# Altium PCB driver_V1.1.PcbDoc (part 2 of 2)
Units mm, origin at the board's own origin, x right, y up, seen from the top; angles counter-clockwise.
Board outline 200 x 65 mm, 2 copper layers (Top Layer, Bottom Layer), stack 1.58 mm thick; 210 components, 21 nets, 550 pads, 102 vias.
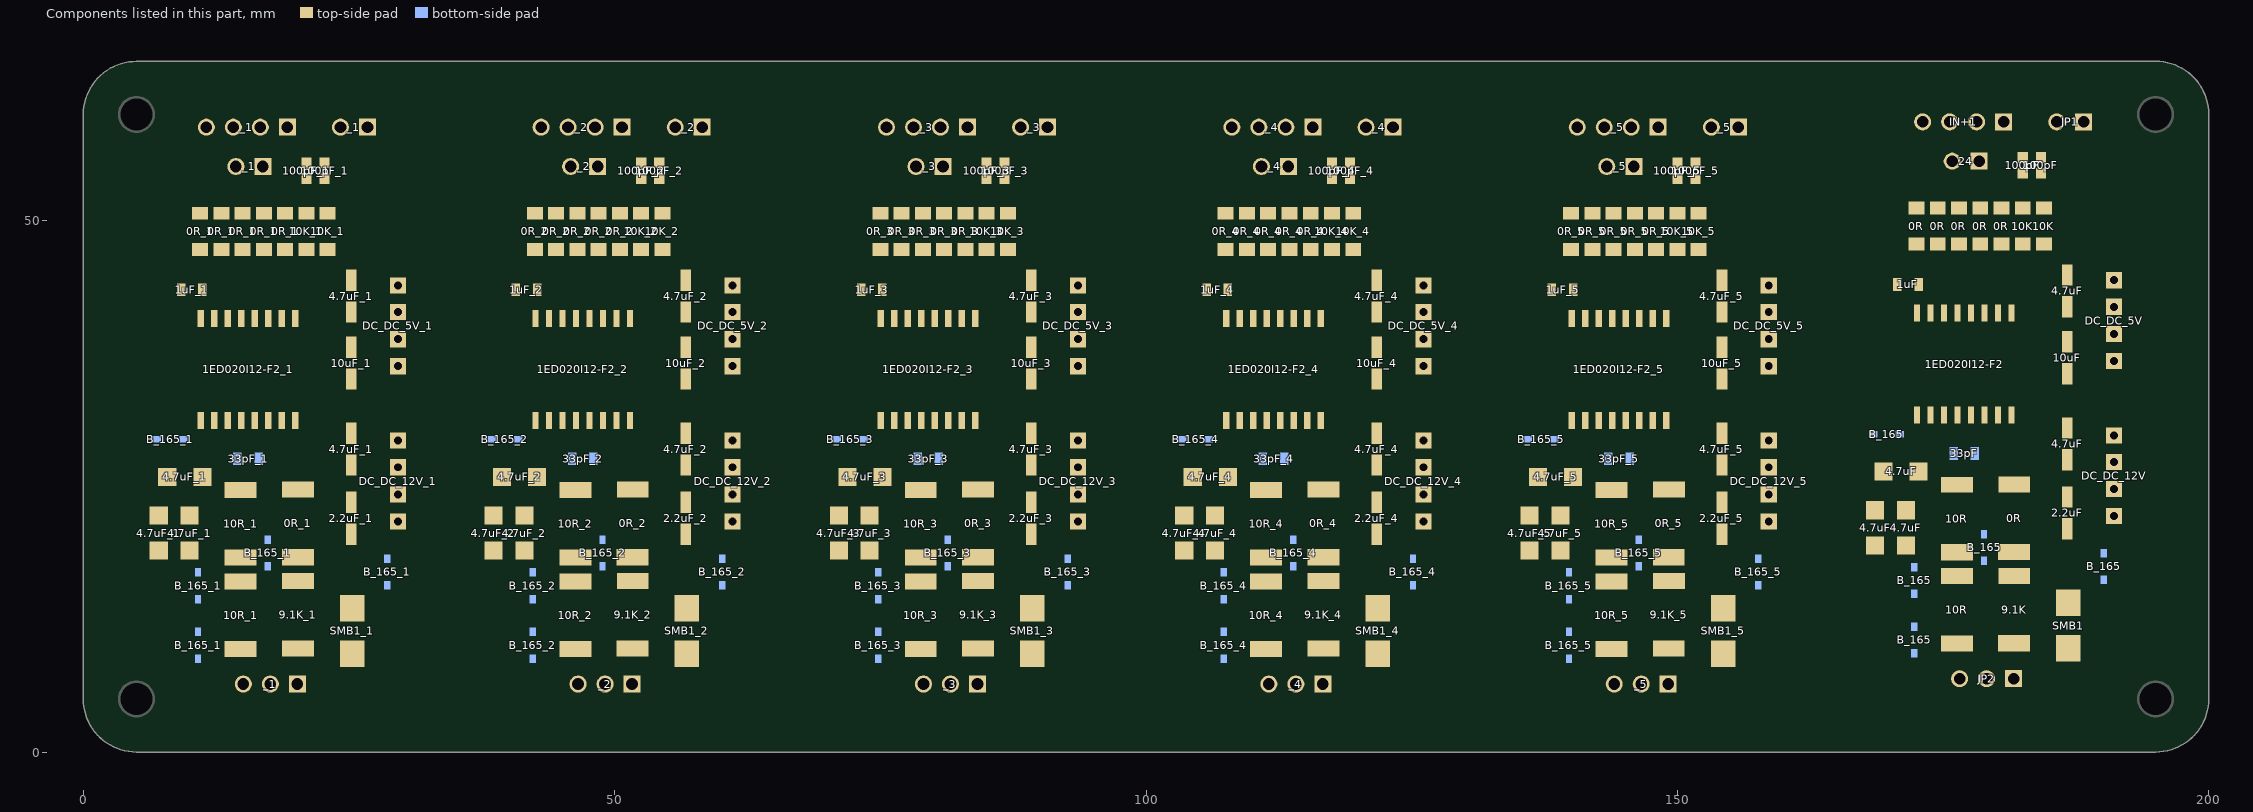
[diagram p2: the components of this part, seen from the top]

## Via types
v1: diameter 0.5, hole 0.2, Top Layer to Bottom Layer, 66 vias
v2: diameter 1, hole 0.72, Top Layer to Bottom Layer, 18 vias
v3: diameter 1.27, hole 0.72, Top Layer to Bottom Layer, 12 vias
v4: diameter 1, hole 0.7, Top Layer to Bottom Layer, 6 vias

## Nets (pads, with @x,y where several pads share a name; then routed paths per layer and width w, separated by ;. In a path a pad name is that pad's centre, name@x,y a point inside that pad or via, vN(x,y) a via of type N, cw(c..) or ccw(c..) an arc to the next point about the centre after c; other vN are vias at no path point) (continued)
copper on no net: | length 3334.4
  Top Layer w0.5: 7.1,22.25 6,23.35 6,30.6 6.52,31.12 v2(6.92,31.12) 10.975,31.12 11.055,31.2 ; v2(7.123,43.497) 9.2,43.497 9.2,41.22 9.62,40.8 11.055,40.8 ; 7.9,25.9 7.9,27.9 8.3,28.3 13.095,28.3 13.595,28.8 13.595,31.2 14.865,31.2 v1(14.865,29.335) ; 11,47.3 11,46.2 13.595,43.605 13.595,40.8 ; 11.2,25.9 11.2,26.8 11.5,27.1 15.4,27.1 16.135,27.835 16.135,31.2 ; 11.58,58.8 11,58.22 11,50.7 ; v3@11.9,22.28 v3@12.05,22.13 ; v1(12.3,29.4) 12.3,31.175 12.325,31.2 ; 12.325,40.8 12.325,43.175 12,43.5 11.2,43.5 11.2,43.996 9.12,46.077 9.12,50.2 9.62,50.7 11,50.7 ; 13,47.3 13,46.1 14.865,44.235 14.865,40.8 ; v1(13.7,14.3) 13.7,13.9 14,13.6 19.8,13.6 20.2,14 20.2,16.085 ; 14.36,58.56 14.12,58.8 14.12,61.26 14.85,61.99 21.3,61.99 22.22,61.07 22.22,55.93 22.7,55.45 ; 14.885,24.8 17.405,24.8 ; 15,47.3 15,46.2 16.135,45.065 16.135,40.8 ; 15,50.7 13,50.7 11,50.7 ; 16.66,58.8 16.9,58.56 16.9,55.1 16.9,50.8 17,50.7 ; 17,47.3 17.405,46.895 v1(17.405,45.28) 17.405,40.8 ; v2@17.319,16.051 v2@17.33,16.04 ; v1@17.4,21.39 v1(17.405,21.395) 17.405,24.8 ; 17.405,31.2 17.405,24.8 ; 18.675,31.2 18.675,25.125 19.215,24.585 20.1,24.585 ; 18.675,40.8 18.675,46.975 19,47.3 ; 19,50.7 19.2,50.9 19.2,58.8 ; v1(19.47,48.89) 20.59,48.89 21,49.3 21,50.7 ; 19.945,31.2 22,31.2 22.9,32.1 22.9,37.7 23.3,38.1 25.2,38.1 ; 19.945,40.8 19.945,43.245 20.3,43.6 22.8,43.6 23,43.8 23,47.3 23.3,47.6 25.3,47.6 25.9,48.2 25.9,54.86 25.31,55.45 22.7,55.45 ; v1(21,46) 21,47.3 ; 21,53.95 21.02,53.93 v1(21.02,52.4) ; 21,55.45 22.7,55.45 ; 22.7,53.95 v1(22.7,52.34) 22.7,51 23,50.7 ; 29.35,38.6 29.6,38.85 ; 29.4,27 29.6,26.8 ; 38.6,22.25 37.5,23.35 37.5,30.6 38.02,31.12 v2(38.42,31.12) 42.475,31.12 42.555,31.2 ; v2(38.623,43.497) 40.7,43.497 40.7,41.22 41.12,40.8 42.555,40.8 ; 39.4,25.9 39.4,27.9 39.8,28.3 44.595,28.3 45.095,28.8 45.095,31.2 46.365,31.2 v1(46.365,29.335) ; 42.5,47.3 42.5,46.2 45.095,43.605 45.095,40.8 ; 42.7,25.9 42.7,26.8 43,27.1 46.9,27.1 47.635,27.835 47.635,31.2 ; 43.08,58.8 42.5,58.22 42.5,50.7 ; v3@43.4,22.28 v3@43.55,22.13 ; v1(43.8,29.4) 43.8,31.175 43.825,31.2 ; 43.825,40.8 43.825,43.175 43.5,43.5 42.7,43.5 42.7,43.996 40.62,46.077 40.62,50.2 41.12,50.7 42.5,50.7 ; 44.5,47.3 44.5,46.1 46.365,44.235 46.365,40.8 ; v1(45.2,14.3) 45.2,13.9 45.5,13.6 51.3,13.6 51.7,14 51.7,16.085 ; 45.86,58.56 45.62,58.8 45.62,61.26 46.35,61.99 52.8,61.99 53.72,61.07 53.72,55.93 54.2,55.45 ; 46.385,24.8 48.905,24.8 ; 46.5,47.3 46.5,46.2 47.635,45.065 47.635,40.8 ; 46.5,50.7 44.5,50.7 42.5,50.7 ; 48.16,58.8 48.4,58.56 48.4,55.1 48.4,50.8 48.5,50.7 ; 48.5,47.3 48.905,46.895 v1(48.905,45.28) 48.905,40.8 ; v2@48.819,16.051 v2@48.83,16.04 ; v1@48.9,21.39 v1(48.905,21.395) 48.905,24.8 ; 48.905,31.2 48.905,24.8 ; 50.175,31.2 50.175,25.125 50.715,24.585 51.6,24.585 ; 50.175,40.8 50.175,46.975 50.5,47.3 ; 50.5,50.7 50.7,50.9 50.7,58.8 ; v1(50.97,48.89) 52.09,48.89 52.5,49.3 52.5,50.7 ; 51.445,31.2 53.5,31.2 54.4,32.1 54.4,37.7 54.8,38.1 56.7,38.1 ; 51.445,40.8 51.445,43.245 51.8,43.6 54.3,43.6 54.5,43.8 54.5,47.3 54.8,47.6 56.8,47.6 57.4,48.2 57.4,54.86 56.81,55.45 54.2,55.45 ; v1(52.5,46) 52.5,47.3 ; 52.5,53.95 52.52,53.93 v1(52.52,52.4) ; 52.5,55.45 54.2,55.45 ; 54.2,53.95 v1(54.2,52.34) 54.2,51 54.5,50.7 ; 60.85,38.6 61.1,38.85 ; 60.9,27 61.1,26.8 ; 71.1,22.25 70,23.35 70,30.6 70.52,31.12 v2(70.92,31.12) 74.975,31.12 75.055,31.2 ; v2(71.123,43.497) 73.2,43.497 73.2,41.22 73.62,40.8 75.055,40.8 ; 71.9,25.9 71.9,27.9 72.3,28.3 77.095,28.3 77.595,28.8 77.595,31.2 78.865,31.2 v1(78.865,29.335) ; 75,47.3 75,46.2 77.595,43.605 77.595,40.8 ; 75.2,25.9 75.2,26.8 75.5,27.1 79.4,27.1 80.135,27.835 80.135,31.2 ; 75.58,58.8 75,58.22 75,50.7 ; v3@75.9,22.28 v3@76.05,22.13 ; v1(76.3,29.4) 76.3,31.175 76.325,31.2 ; 76.325,40.8 76.325,43.175 76,43.5 75.2,43.5 75.2,43.996 73.12,46.077 73.12,50.2 73.62,50.7 75,50.7 ; 77,47.3 77,46.1 78.865,44.235 78.865,40.8 ; v1(77.7,14.3) 77.7,13.9 78,13.6 83.8,13.6 84.2,14 84.2,16.085 ; 78.36,58.56 78.12,58.8 78.12,61.26 78.85,61.99 85.3,61.99 86.22,61.07 86.22,55.93 86.7,55.45 ; 78.885,24.8 81.405,24.8 ; 79,47.3 79,46.2 80.135,45.065 80.135,40.8 ; 79,50.7 77,50.7 75,50.7 ; 80.66,58.8 80.9,58.56 80.9,55.1 80.9,50.8 81,50.7 ; 81,47.3 81.405,46.895 v1(81.405,45.28) 81.405,40.8 ; v2@81.319,16.051 v2@81.33,16.04 ; v1@81.4,21.39 v1(81.405,21.395) 81.405,24.8 ; 81.405,31.2 81.405,24.8 ; 82.675,31.2 82.675,25.125 83.215,24.585 84.1,24.585 ; 82.675,40.8 82.675,46.975 83,47.3 ; 83,50.7 83.2,50.9 83.2,58.8 ; v1(83.47,48.89) 84.59,48.89 85,49.3 85,50.7 ; 83.945,31.2 86,31.2 86.9,32.1 86.9,37.7 87.3,38.1 89.2,38.1 ; 83.945,40.8 83.945,43.245 84.3,43.6 86.8,43.6 87,43.8 87,47.3 87.3,47.6 89.3,47.6 89.9,48.2 89.9,54.86 89.31,55.45 86.7,55.45 ; v1(85,46) 85,47.3 ; 85,53.95 85.02,53.93 v1(85.02,52.4) ; 85,55.45 86.7,55.45 ; 86.7,53.95 v1(86.7,52.34) 86.7,51 87,50.7 ; 93.35,38.6 93.6,38.85 ; 93.4,27 93.6,26.8 ; 103.6,22.25 102.5,23.35 102.5,30.6 103.02,31.12 v2(103.42,31.12) 107.475,31.12 107.555,31.2 ; v2(103.623,43.497) 105.7,43.497 105.7,41.22 106.12,40.8 107.555,40.8 ; 104.4,25.9 104.4,27.9 104.8,28.3 109.595,28.3 110.095,28.8 110.095,31.2 111.365,31.2 v1(111.365,29.335) ; 107.5,47.3 107.5,46.2 110.095,43.605 110.095,40.8 ; 107.7,25.9 107.7,26.8 108,27.1 111.9,27.1 112.635,27.835 112.635,31.2 ; 108.08,58.8 107.5,58.22 107.5,50.7 ; v3@108.4,22.28 v3@108.55,22.13 ; v1(108.8,29.4) 108.8,31.175 108.825,31.2 ; 108.825,40.8 108.825,43.175 108.5,43.5 107.7,43.5 107.7,43.996 105.62,46.077 105.62,50.2 106.12,50.7 107.5,50.7 ; 109.5,47.3 109.5,46.1 111.365,44.235 111.365,40.8 ; v1(110.2,14.3) 110.2,13.9 110.5,13.6 116.3,13.6 116.7,14 116.7,16.085 ; 110.86,58.56 110.62,58.8 110.62,61.26 111.35,61.99 117.8,61.99 118.72,61.07 118.72,55.93 119.2,55.45 ; 111.385,24.8 113.905,24.8 ; 111.5,47.3 111.5,46.2 112.635,45.065 112.635,40.8 ; 111.5,50.7 109.5,50.7 107.5,50.7 ; 113.16,58.8 113.4,58.56 113.4,55.1 113.4,50.8 113.5,50.7 ; 113.5,47.3 113.905,46.895 v1(113.905,45.28) 113.905,40.8 ; v2@113.819,16.051 v2@113.83,16.04 ; v1@113.9,21.39 v1(113.905,21.395) 113.905,24.8 ; 113.905,31.2 113.905,24.8 ; 115.175,31.2 115.175,25.125 115.715,24.585 116.6,24.585 ; 115.175,40.8 115.175,46.975 115.5,47.3 ; 115.5,50.7 115.7,50.9 115.7,58.8 ; v1(115.97,48.89) 117.09,48.89 117.5,49.3 117.5,50.7 ; 116.445,31.2 118.5,31.2 119.4,32.1 119.4,37.7 119.8,38.1 121.7,38.1 ; 116.445,40.8 116.445,43.245 116.8,43.6 119.3,43.6 119.5,43.8 119.5,47.3 119.8,47.6 121.8,47.6 122.4,48.2 122.4,54.86 121.81,55.45 119.2,55.45 ; v1(117.5,46) 117.5,47.3 ; 117.5,53.95 117.52,53.93 v1(117.52,52.4) ; 117.5,55.45 119.2,55.45 ; 119.2,53.95 v1(119.2,52.34) 119.2,51 119.5,50.7 ; 125.85,38.6 126.1,38.85 ; 125.9,27 126.1,26.8 ; 136.1,22.25 135,23.35 135,30.6 135.52,31.12 v2(135.92,31.12) 139.975,31.12 140.055,31.2 ; v2(136.123,43.497) 138.2,43.497 138.2,41.22 138.62,40.8 140.055,40.8 ; 136.9,25.9 136.9,27.9 137.3,28.3 142.095,28.3 142.595,28.8 142.595,31.2 143.865,31.2 v1(143.865,29.335) ; 140,47.3 140,46.2 142.595,43.605 142.595,40.8 ; 140.2,25.9 140.2,26.8 140.5,27.1 144.4,27.1 145.135,27.835 145.135,31.2 ; 140.58,58.8 140,58.22 140,50.7 ; v3@140.9,22.28 v3@141.05,22.13 ; v1(141.3,29.4) 141.3,31.175 141.325,31.2 ; 141.325,40.8 141.325,43.175 141,43.5 140.2,43.5 140.2,43.996 138.12,46.077 138.12,50.2 138.62,50.7 140,50.7 ; 142,47.3 142,46.1 143.865,44.235 143.865,40.8 ; v1(142.7,14.3) 142.7,13.9 143,13.6 148.8,13.6 149.2,14 149.2,16.085 ; 143.36,58.56 143.12,58.8 143.12,61.26 143.85,61.99 150.3,61.99 151.22,61.07 151.22,55.93 151.7,55.45 ; 143.885,24.8 146.405,24.8 ; 144,47.3 144,46.2 145.135,45.065 145.135,40.8 ; 144,50.7 142,50.7 140,50.7 ; 145.66,58.8 145.9,58.56 145.9,55.1 145.9,50.8 146,50.7 ; 146,47.3 146.405,46.895 v1(146.405,45.28) 146.405,40.8 ; v2@146.319,16.051 v2@146.33,16.04 ; v1@146.4,21.39 v1(146.405,21.395) 146.405,24.8 ; 146.405,31.2 146.405,24.8 ; 147.675,31.2 147.675,25.125 148.215,24.585 149.1,24.585 ; 147.675,40.8 147.675,46.975 148,47.3 ; 148,50.7 148.2,50.9 148.2,58.8 ; v1(148.47,48.89) 149.59,48.89 150,49.3 150,50.7 ; 148.945,31.2 151,31.2 151.9,32.1 151.9,37.7 152.3,38.1 154.2,38.1 ; 148.945,40.8 148.945,43.245 149.3,43.6 151.8,43.6 152,43.8 152,47.3 152.3,47.6 154.3,47.6 154.9,48.2 154.9,54.86 154.31,55.45 151.7,55.45 ; v1(150,46) 150,47.3 ; 150,53.95 150.02,53.93 v1(150.02,52.4) ; 150,55.45 151.7,55.45 ; 151.7,53.95 v1(151.7,52.34) 151.7,51 152,50.7 ; 158.35,38.6 158.6,38.85 ; 158.4,27 158.6,26.8
  Top Layer w1: 7.1,18.95 10,18.95 ; 7.1,22.25 10,22.25 ; 10,19.05 10,18.95 ; 11.2,25.9 11.9,25.2 v3@11.9,22.28 ; 14.808,16.051 v2@17.319,16.051 ; 15.06,6.4 14.8,6.66 14.8,9.7 12.05,9.7 11.9,9.85 11.9,18.1 12.1,18.3 14.8,18.3 19.558,18.3 19.707,18.449 ; 17.6,4.56 17.6,6.4 ; 20.14,6.4 24.7,6.4 25.3,7 25.3,9.25 ; 20.192,10.034 20.734,10.034 24.25,13.55 25.3,13.55 ; 20.2,16.285 v4@26.435,16.285 ; 25.2,20.5 28.39,20.5 29.6,21.71 ; 25.2,23.5 25.95,24.25 29.6,24.25 32.3,24.25 ; 25.2,27 29.4,27 ; 25.2,30 28.9,30 29.6,29.3 ; 25.2,35.1 25.5,35.4 28.69,35.4 29.6,36.31 31.49,36.31 32.3,35.5 32.3,24.25 ; 25.2,38.1 25.7,38.6 29.35,38.6 ; 25.2,41.4 29.6,41.4 ; 25.2,44.4 25.7,43.9 29.6,43.9 ; 38.6,18.95 41.5,18.95 ; 38.6,22.25 41.5,22.25 ; 41.5,19.05 41.5,18.95 ; 42.7,25.9 43.4,25.2 v3@43.4,22.28 ; 46.308,16.051 v2@48.819,16.051 ; 46.56,6.4 46.3,6.66 46.3,9.7 43.55,9.7 43.4,9.85 43.4,18.1 43.6,18.3 46.3,18.3 51.058,18.3 51.207,18.449 ; 49.1,4.56 49.1,6.4 ; 51.64,6.4 56.2,6.4 56.8,7 56.8,9.25 ; 51.692,10.034 52.234,10.034 55.75,13.55 56.8,13.55 ; 51.7,16.285 v4@57.935,16.285 ; 56.7,20.5 59.89,20.5 61.1,21.71 ; 56.7,23.5 57.45,24.25 61.1,24.25 63.8,24.25 ; 56.7,27 60.9,27 ; 56.7,30 60.4,30 61.1,29.3 ; 56.7,35.1 57,35.4 60.19,35.4 61.1,36.31 62.99,36.31 63.8,35.5 63.8,24.25 ; 56.7,38.1 57.2,38.6 60.85,38.6 ; 56.7,41.4 61.1,41.4 ; 56.7,44.4 57.2,43.9 61.1,43.9 ; 71.1,18.95 74,18.95 ; 71.1,22.25 74,22.25 ; 74,19.05 74,18.95 ; 75.2,25.9 75.9,25.2 v3@75.9,22.28 ; 78.808,16.051 v2@81.319,16.051 ; 79.06,6.4 78.8,6.66 78.8,9.7 76.05,9.7 75.9,9.85 75.9,18.1 76.1,18.3 78.8,18.3 83.558,18.3 83.707,18.449 ; 81.6,4.56 81.6,6.4 ; 84.14,6.4 88.7,6.4 89.3,7 89.3,9.25 ; 84.192,10.034 84.734,10.034 88.25,13.55 89.3,13.55 ; 84.2,16.285 v4@90.435,16.285 ; 89.2,20.5 92.39,20.5 93.6,21.71 ; 89.2,23.5 89.95,24.25 93.6,24.25 96.3,24.25 ; 89.2,27 93.4,27 ; 89.2,30 92.9,30 93.6,29.3 ; 89.2,35.1 89.5,35.4 92.69,35.4 93.6,36.31 95.49,36.31 96.3,35.5 96.3,24.25 ; 89.2,38.1 89.7,38.6 93.35,38.6 ; 89.2,41.4 93.6,41.4 ; 89.2,44.4 89.7,43.9 93.6,43.9 ; 103.6,18.95 106.5,18.95 ; 103.6,22.25 106.5,22.25 ; 106.5,19.05 106.5,18.95 ; 107.7,25.9 108.4,25.2 v3@108.4,22.28 ; 111.308,16.051 v2@113.819,16.051 ; 111.56,6.4 111.3,6.66 111.3,9.7 108.55,9.7 108.4,9.85 108.4,18.1 108.6,18.3 111.3,18.3 116.058,18.3 116.207,18.449 ; 114.1,4.56 114.1,6.4 ; 116.64,6.4 121.2,6.4 121.8,7 121.8,9.25 ; 116.692,10.034 117.234,10.034 120.75,13.55 121.8,13.55 ; 116.7,16.285 v4@122.935,16.285 ; 121.7,20.5 124.89,20.5 126.1,21.71 ; 121.7,23.5 122.45,24.25 126.1,24.25 128.8,24.25 ; 121.7,27 125.9,27 ; 121.7,30 125.4,30 126.1,29.3 ; 121.7,35.1 122,35.4 125.19,35.4 126.1,36.31 127.99,36.31 128.8,35.5 128.8,24.25 ; 121.7,38.1 122.2,38.6 125.85,38.6 ; 121.7,41.4 126.1,41.4 ; 121.7,44.4 122.2,43.9 126.1,43.9 ; 136.1,18.95 139,18.95 ; 136.1,22.25 139,22.25 ; 139,19.05 139,18.95 ; 140.2,25.9 140.9,25.2 v3@140.9,22.28 ; 143.808,16.051 v2@146.319,16.051 ; 144.06,6.4 143.8,6.66 143.8,9.7 141.05,9.7 140.9,9.85 140.9,18.1 141.1,18.3 143.8,18.3 148.558,18.3 148.707,18.449 ; 146.6,4.56 146.6,6.4 ; 149.14,6.4 153.7,6.4 154.3,7 154.3,9.25 ; 149.192,10.034 149.734,10.034 153.25,13.55 154.3,13.55 ; 149.2,16.285 v4@155.435,16.285 ; 154.2,20.5 157.39,20.5 158.6,21.71 ; 154.2,23.5 154.95,24.25 158.6,24.25 161.3,24.25 ; 154.2,27 158.4,27 ; 154.2,30 157.9,30 158.6,29.3 ; 154.2,35.1 154.5,35.4 157.69,35.4 158.6,36.31 160.49,36.31 161.3,35.5 161.3,24.25 ; 154.2,38.1 154.7,38.6 158.35,38.6 ; 154.2,41.4 158.6,41.4 ; 154.2,44.4 154.7,43.9 158.6,43.9 ; 10,18.95 10,8 10.4,7.6 11.1,7.6 11.4,7.3 11.4,5.1 12.27,4.23 28.07,4.23 28.3,4.46 28.3,9.7 28.9,10.3 31.6,10.3 32.3,11 32.3,24.25 ; 41.5,18.95 41.5,8 41.9,7.6 42.6,7.6 42.9,7.3 42.9,5.1 43.77,4.23 59.57,4.23 59.8,4.46 59.8,9.7 60.4,10.3 63.1,10.3 63.8,11 63.8,24.25 ; 74,18.95 74,8 74.4,7.6 75.1,7.6 75.4,7.3 75.4,5.1 76.27,4.23 92.07,4.23 92.3,4.46 92.3,9.7 92.9,10.3 95.6,10.3 96.3,11 96.3,24.25 ; 106.5,18.95 106.5,8 106.9,7.6 107.6,7.6 107.9,7.3 107.9,5.1 108.77,4.23 124.57,4.23 124.8,4.46 124.8,9.7 125.4,10.3 128.1,10.3 128.8,11 128.8,24.25 ; 139,18.95 139,8 139.4,7.6 140.1,7.6 140.4,7.3 140.4,5.1 141.27,4.23 157.07,4.23 157.3,4.46 157.3,9.7 157.9,10.3 160.6,10.3 161.3,11 161.3,24.25
  Bottom Layer w0.5: v1(13.7,14.3) 13.7,16.5 13.3,16.9 10.8,16.9 10.3,17.4 10.3,28.539 10.961,29.2 12.1,29.2 v1(12.3,29.4) 12.3,27.9 12.597,27.603 14.5,27.603 ; v1(14.865,29.335) 21.465,29.335 21.9,28.9 21.9,24.8 22.45,24.25 29.6,24.25 31.42,24.25 32.23,23.44 32.23,19.12 31.32,18.21 28.62,18.21 ; v1@14.9,29.3 16.5,29.3 16.5,27.6 ; 16.66,55.34 16.9,55.1 ; 17.38,20.02 17.405,19.995 v1(17.405,21.395) ; v1(17.405,45.28) 20.66,45.28 21.02,45.64 v1(21.02,52.4) ; v1(18.7,43.98) 21.77,43.98 22.7,44.91 v1(22.7,52.34) ; 24.2,58.8 24.5,58.5 24.5,42 25.1,41.4 26.4,41.4 ; 29.6,26.8 27.2,26.8 26.4,27.6 26.4,41.4 ; 29.6,41.4 26.4,41.4 ; v1(45.2,14.3) 45.2,16.5 44.8,16.9 42.3,16.9 41.8,17.4 41.8,28.539 42.461,29.2 43.6,29.2 v1(43.8,29.4) 43.8,27.9 44.097,27.603 46,27.603 ; v1(46.365,29.335) 52.965,29.335 53.4,28.9 53.4,24.8 53.95,24.25 61.1,24.25 62.92,24.25 63.73,23.44 63.73,19.12 62.82,18.21 60.12,18.21 ; v1@46.4,29.3 48,29.3 48,27.6 ; 48.16,55.34 48.4,55.1 ; 48.88,20.02 48.86,20 48.86,21.35 v1(48.905,21.395) ; v1(48.905,45.28) 52.16,45.28 52.52,45.64 v1(52.52,52.4) ; v1(50.2,43.98) 53.27,43.98 54.2,44.91 v1(54.2,52.34) ; 55.7,58.8 56,58.5 56,42 56.6,41.4 57.9,41.4 ; 61.1,26.8 58.7,26.8 57.9,27.6 57.9,41.4 ; 61.1,41.4 57.9,41.4 ; v1(77.7,14.3) 77.7,16.5 77.3,16.9 74.8,16.9 74.3,17.4 74.3,28.539 74.961,29.2 76.1,29.2 v1(76.3,29.4) 76.3,27.9 76.597,27.603 78.5,27.603 ; v1(78.865,29.335) 85.465,29.335 85.9,28.9 85.9,24.8 86.45,24.25 93.6,24.25 95.42,24.25 96.23,23.44 96.23,19.12 95.32,18.21 92.62,18.21 ; v1@78.9,29.3 80.5,29.3 80.5,27.6 ; 80.66,55.34 80.9,55.1 ; 81.38,20.02 81.36,20 81.36,21.35 v1(81.405,21.395) ; v1(81.405,45.28) 84.66,45.28 85.02,45.64 v1(85.02,52.4) ; v1(82.7,43.98) 85.77,43.98 86.7,44.91 v1(86.7,52.34) ; 88.2,58.8 88.5,58.5 88.5,42 89.1,41.4 90.4,41.4 ; 93.6,26.8 91.2,26.8 90.4,27.6 90.4,41.4 ; 93.6,41.4 90.4,41.4 ; v1(110.2,14.3) 110.2,16.5 109.8,16.9 107.3,16.9 106.8,17.4 106.8,28.539 107.461,29.2 108.6,29.2 v1(108.8,29.4) 108.8,27.9 109.097,27.603 111,27.603 ; v1(111.365,29.335) 117.965,29.335 118.4,28.9 118.4,24.8 118.95,24.25 126.1,24.25 127.92,24.25 128.73,23.44 128.73,19.12 127.82,18.21 125.12,18.21 ; v1@111.4,29.3 113,29.3 113,27.6 ; 113.16,55.34 113.4,55.1 ; 113.88,20.02 113.86,20 113.86,21.35 v1(113.905,21.395) ; v1(113.905,45.28) 117.16,45.28 117.52,45.64 v1(117.52,52.4) ; v1(115.2,43.98) 118.27,43.98 119.2,44.91 v1(119.2,52.34) ; 120.7,58.8 121,58.5 121,42 121.6,41.4 122.9,41.4 ; 126.1,26.8 123.7,26.8 122.9,27.6 122.9,41.4 ; 126.1,41.4 122.9,41.4 ; v1(142.7,14.3) 142.7,16.5 142.3,16.9 139.8,16.9 139.3,17.4 139.3,28.539 139.961,29.2 141.1,29.2 v1(141.3,29.4) 141.3,27.9 141.597,27.603 143.5,27.603 ; v1(143.865,29.335) 150.465,29.335 150.9,28.9 150.9,24.8 151.45,24.25 158.6,24.25 160.42,24.25 161.23,23.44 161.23,19.12 160.32,18.21 157.62,18.21 ; v1@143.9,29.3 145.5,29.3 145.5,27.6 ; 145.66,55.34 145.9,55.1 ; 146.38,20.02 146.36,20 146.36,21.35 v1(146.405,21.395) ; v1(146.405,45.28) 149.66,45.28 150.02,45.64 v1(150.02,52.4) ; v1(147.7,43.98) 150.77,43.98 151.7,44.91 v1(151.7,52.34) ; 153.2,58.8 153.5,58.5 153.5,42 154.1,41.4 155.4,41.4 ; 158.6,26.8 156.2,26.8 155.4,27.6 155.4,41.4 ; 158.6,41.4 155.4,41.4
  Bottom Layer w1: 6.92,29.42 v2(6.92,31.12) 7.4,31.6 22.3,31.6 v3(22.8,32.1) ; v2@7.14,43.6 7.14,42.95 7.39,42.7 v1(19.94,42.7) ; 8.58,28.98 8.58,9.52 9.3,8.8 10.8,8.8 10.8,7.7 12.1,6.4 15.06,6.4 ; 10.8,11.3 14.9,11.3 15.7,12.1 15.7,21.4 14.94,22.16 v3(12.03,22.16) 12.03,25.33 12.6,25.9 18.8,25.9 19.3,25.4 19.3,22.2 19.79,21.71 29.6,21.71 ; 11.58,58.8 11.58,49.62 12.31,48.89 v1(19.47,48.89) v1@19.56,48.89 ; 14.12,58.8 14.36,58.56 14.36,55.1 ; v2(17.36,16.05) 17.36,17.5 ; v4(26.43,16.29) 26.53,16.39 27.94,16.39 28.62,15.71 ; 26.74,58.8 28.3,58.8 29.1,58 29.1,44.4 29.6,43.9 32,43.9 32.5,43.4 32.5,29.8 32,29.3 29.6,29.3 ; 38.42,29.42 v2(38.42,31.12) 38.9,31.6 53.8,31.6 v3(54.3,32.1) ; v2@38.64,43.6 38.64,42.95 38.89,42.7 v1(51.44,42.7) ; 40.08,28.98 40.08,9.52 40.8,8.8 42.3,8.8 42.3,7.7 43.6,6.4 46.56,6.4 ; 42.3,11.3 46.4,11.3 47.2,12.1 47.2,21.4 46.44,22.16 v3(43.53,22.16) 43.53,25.33 44.1,25.9 50.3,25.9 50.8,25.4 50.8,22.2 51.29,21.71 61.1,21.71 ; 43.08,58.8 43.08,49.62 43.81,48.89 v1(50.97,48.89) v1@51.06,48.89 ; 45.62,58.8 45.86,58.56 45.86,55.1 ; v2(48.86,16.05) 48.86,17.5 ; v4(57.93,16.29) 58.03,16.39 59.44,16.39 60.12,15.71 ; 58.24,58.8 59.8,58.8 60.6,58 60.6,44.4 61.1,43.9 63.5,43.9 64,43.4 64,29.8 63.5,29.3 61.1,29.3 ; 70.92,29.42 v2(70.92,31.12) 71.4,31.6 86.3,31.6 v3(86.8,32.1) ; v2@71.14,43.6 71.14,42.95 71.39,42.7 v1(83.94,42.7) ; 72.58,28.98 72.58,9.52 73.3,8.8 74.8,8.8 74.8,7.7 76.1,6.4 79.06,6.4 ; 74.8,11.3 78.9,11.3 79.7,12.1 79.7,21.4 78.94,22.16 v3(76.03,22.16) 76.03,25.33 76.6,25.9 82.8,25.9 83.3,25.4 83.3,22.2 83.79,21.71 93.6,21.71 ; 75.58,58.8 75.58,49.62 76.31,48.89 v1(83.47,48.89) v1@83.56,48.89 ; 78.12,58.8 78.36,58.56 78.36,55.1 ; v2(81.36,16.05) 81.36,17.5 ; v4(90.43,16.29) 90.53,16.39 91.94,16.39 92.62,15.71 ; 90.74,58.8 92.3,58.8 93.1,58 93.1,44.4 93.6,43.9 96,43.9 96.5,43.4 96.5,29.8 96,29.3 93.6,29.3 ; 103.42,29.42 v2(103.42,31.12) 103.9,31.6 118.8,31.6 v3(119.3,32.1) ; v2@103.64,43.6 103.64,42.95 103.89,42.7 v1(116.44,42.7) ; 105.08,28.98 105.08,9.52 105.8,8.8 107.3,8.8 107.3,7.7 108.6,6.4 111.56,6.4 ; 107.3,11.3 111.4,11.3 112.2,12.1 112.2,21.4 111.44,22.16 v3(108.53,22.16) 108.53,25.33 109.1,25.9 115.3,25.9 115.8,25.4 115.8,22.2 116.29,21.71 126.1,21.71 ; 108.08,58.8 108.08,49.62 108.81,48.89 v1(115.97,48.89) v1@116.06,48.89 ; 110.62,58.8 110.86,58.56 110.86,55.1 ; v2(113.86,16.05) 113.86,17.5 ; v4(122.93,16.29) 123.03,16.39 124.44,16.39 125.12,15.71 ; 123.24,58.8 124.8,58.8 125.6,58 125.6,44.4 126.1,43.9 128.5,43.9 129,43.4 129,29.8 128.5,29.3 126.1,29.3 ; 135.92,29.42 v2(135.92,31.12) 136.4,31.6 151.3,31.6 v3(151.8,32.1) ; v2@136.14,43.6 136.14,42.95 136.39,42.7 v1(148.94,42.7) ; 137.58,28.98 137.58,9.52 138.3,8.8 139.8,8.8 139.8,7.7 141.1,6.4 144.06,6.4 ; 139.8,11.3 143.9,11.3 144.7,12.1 144.7,21.4 143.94,22.16 v3(141.03,22.16) 141.03,25.33 141.6,25.9 147.8,25.9 148.3,25.4 148.3,22.2 148.79,21.71 158.6,21.71 ; 140.58,58.8 140.58,49.62 141.31,48.89 v1(148.47,48.89) v1@148.56,48.89 ; 143.12,58.8 143.36,58.56 143.36,55.1 ; v2(146.36,16.05) 146.36,17.5 ; v4(155.43,16.29) 155.53,16.39 156.94,16.39 157.62,15.71 ; 155.74,58.8 157.3,58.8 158.1,58 158.1,44.4 158.6,43.9 161,43.9 161.5,43.4 161.5,29.8 161,29.3 158.6,29.3

## Keep-outs
Keep-Out Layer:
  lines w0.2: 5.022,64.988 ccw(c5,59.988) 0,60 0,34 0,5 ccw(c5,5) 5,0 195,0 ccw(c195,5) 200,5 200,60 ccw(c195,60) 195,65 5.022,65

## Other copper
Top Layer:
  region net -5V: 184.7,30.9 185.2,31.1 185.2,38.3 187.2,38.3 187.2,39.6 183.5,39.6 183.5,32.7 181,32.7 181,30.9
  region net -5V: 172.9,32.5 172.8,32.6 172,32.6 167.2,32.6 167.2,21.9 168,21.9 168,30.8 172,30.8 172.9,30.8
  region net HS_GND: 178.5,3.4 171.9,3.4 171.9,3.5 171.9,7.4 170.9,8.3 170.9,9.1 170.9,21.4 172.1,21.4 172.1,9.3 172.9,8.7 173.9,8.7 173.9,5.3 178.5,5.3
  region net HS_GND: 178.2,7.9 180,7.9 180,5.211 189.2,5.211 189.2,11.2 189.2,11.8 189.31,11.8 189.31,11.765 190.021,11.765 190.8,11.8 190.8,3.4 178.2,3.4
  region net HS_GND: 186.1,34.6 186.1,36.7 189.9,36.7 190,36.8 190,37.7 194.3,37.7 194.5,37.5 194.4,9.787 189.78,9.787 189.2,9.787 189.2,17.6 193,17.6 193,26.4 193,34.6
  region net 5V: 173.9,52 173.9,60.5 171.8,60.5 171.8,60.3 171.8,56 171.8,52
  region net 5V: 171.5,50.5 177.2,50.5 177.2,52 171.5,52
  region net GND_D: 172.9,42.2 172.9,40.5 167.7,40.5 167.5,40.5 167.4,40.4 167.4,45.5 170.2,45.5 171.1,44.6 171.1,42.2
  region net GND_D: 183,56.5 183,61.5 182.8,61.5 176.5,61.5 176.5,58.1 174.7,58.1 174.7,63.3 176.2,63.3 184.4,63.3 184.4,56.4 183,56.4
  region net GND_D: 185.6,46.8 187.7,46.8 187.7,56.4 187.3,56.7 186,56.7 184.6,56.7 181.9,56.7 181.9,55.5 186,55.5 186,51.8 186,48.6 185.6,48.6
  region net GND_D: 181.1,40.4 181.8,40.4 182.5,40.4 182.5,43.7 185.5,43.7 185.5,46.788 185.6,46.8 185.6,48.6 185.5,48.6 183.8,48.6 183.9,44.9 181.1,44.9 181.1,44.2 181.1,43.4
  region: 19.6,39.9 20.3,39.9 21,39.9 21,43.2 24,43.2 24,46.288 24.1,46.3 24.1,48.1 24,48.1 22.3,48.1 22.4,44.4 19.6,44.4 19.6,43.7 19.6,42.9
  region: 24.1,46.3 26.2,46.3 26.2,55.9 25.8,56.2 24.5,56.2 23.1,56.2 20.4,56.2 20.4,55 24.5,55 24.5,51.3 24.5,48.1 24.1,48.1
  region: 21.5,56 21.5,61 21.3,61 15,61 15,57.6 13.2,57.6 13.2,62.8 14.7,62.8 22.9,62.8 22.9,55.9 21.5,55.9
  region: 11.4,41.7 11.4,40 6.2,40 6,40 5.9,39.9 5.9,45 8.7,45 9.6,44.1 9.6,41.7
  region: 10,50 15.7,50 15.7,51.5 10,51.5
  region: 12.4,51.5 12.4,60 10.3,60 10.3,59.8 10.3,55.5 10.3,51.5
  region: 24.6,34.1 24.6,36.2 28.4,36.2 28.5,36.3 28.5,37.2 32.8,37.2 33,37 32.9,9.287 28.28,9.287 27.7,9.287 27.7,17.1 31.5,17.1 31.5,25.9 31.5,34.1
  region: 16.7,7.4 18.5,7.4 18.5,4.711 27.7,4.711 27.7,10.7 27.7,11.3 27.81,11.3 27.81,11.265 28.521,11.265 29.3,11.3 29.3,2.9 16.7,2.9
  region: 17,2.9 10.4,2.9 10.4,3 10.4,6.9 9.4,7.8 9.4,8.6 9.4,20.9 10.6,20.9 10.6,8.8 11.4,8.2 12.4,8.2 12.4,4.8 17,4.8
  region: 11.4,32 11.3,32.1 10.5,32.1 5.7,32.1 5.7,21.4 6.5,21.4 6.5,30.3 10.5,30.3 11.4,30.3
  region: 23.2,30.4 23.7,30.6 23.7,37.8 25.7,37.8 25.7,39.1 22,39.1 22,32.2 19.5,32.2 19.5,30.4
  region: 51.1,39.9 51.8,39.9 52.5,39.9 52.5,43.2 55.5,43.2 55.5,46.288 55.6,46.3 55.6,48.1 55.5,48.1 53.8,48.1 53.9,44.4 51.1,44.4 51.1,43.7 51.1,42.9
  region: 55.6,46.3 57.7,46.3 57.7,55.9 57.3,56.2 56,56.2 54.6,56.2 51.9,56.2 51.9,55 56,55 56,51.3 56,48.1 55.6,48.1
  region: 53,56 53,61 52.8,61 46.5,61 46.5,57.6 44.7,57.6 44.7,62.8 46.2,62.8 54.4,62.8 54.4,55.9 53,55.9
  region: 42.9,41.7 42.9,40 37.7,40 37.5,40 37.4,39.9 37.4,45 40.2,45 41.1,44.1 41.1,41.7
  region: 41.5,50 47.2,50 47.2,51.5 41.5,51.5
  region: 43.9,51.5 43.9,60 41.8,60 41.8,59.8 41.8,55.5 41.8,51.5
  region: 56.1,34.1 56.1,36.2 59.9,36.2 60,36.3 60,37.2 64.3,37.2 64.5,37 64.4,9.287 59.78,9.287 59.2,9.287 59.2,17.1 63,17.1 63,25.9 63,34.1
  region: 48.2,7.4 50,7.4 50,4.711 59.2,4.711 59.2,10.7 59.2,11.3 59.31,11.3 59.31,11.265 60.021,11.265 60.8,11.3 60.8,2.9 48.2,2.9
  region: 48.5,2.9 41.9,2.9 41.9,3 41.9,6.9 40.9,7.8 40.9,8.6 40.9,20.9 42.1,20.9 42.1,8.8 42.9,8.2 43.9,8.2 43.9,4.8 48.5,4.8
  region: 42.9,32 42.8,32.1 42,32.1 37.2,32.1 37.2,21.4 38,21.4 38,30.3 42,30.3 42.9,30.3
  region: 54.7,30.4 55.2,30.6 55.2,37.8 57.2,37.8 57.2,39.1 53.5,39.1 53.5,32.2 51,32.2 51,30.4
  region: 83.6,39.9 84.3,39.9 85,39.9 85,43.2 88,43.2 88,46.288 88.1,46.3 88.1,48.1 88,48.1 86.3,48.1 86.4,44.4 83.6,44.4 83.6,43.7 83.6,42.9
  region: 88.1,46.3 90.2,46.3 90.2,55.9 89.8,56.2 88.5,56.2 87.1,56.2 84.4,56.2 84.4,55 88.5,55 88.5,51.3 88.5,48.1 88.1,48.1
  region: 85.5,56 85.5,61 85.3,61 79,61 79,57.6 77.2,57.6 77.2,62.8 78.7,62.8 86.9,62.8 86.9,55.9 85.5,55.9
  region: 75.4,41.7 75.4,40 70.2,40 70,40 69.9,39.9 69.9,45 72.7,45 73.6,44.1 73.6,41.7
  region: 74,50 79.7,50 79.7,51.5 74,51.5
  region: 76.4,51.5 76.4,60 74.3,60 74.3,59.8 74.3,55.5 74.3,51.5
  region: 88.6,34.1 88.6,36.2 92.4,36.2 92.5,36.3 92.5,37.2 96.8,37.2 97,37 96.9,9.287 92.28,9.287 91.7,9.287 91.7,17.1 95.5,17.1 95.5,25.9 95.5,34.1
  region: 80.7,7.4 82.5,7.4 82.5,4.711 91.7,4.711 91.7,10.7 91.7,11.3 91.81,11.3 91.81,11.265 92.521,11.265 93.3,11.3 93.3,2.9 80.7,2.9
  region: 81,2.9 74.4,2.9 74.4,3 74.4,6.9 73.4,7.8 73.4,8.6 73.4,20.9 74.6,20.9 74.6,8.8 75.4,8.2 76.4,8.2 76.4,4.8 81,4.8
  region: 75.4,32 75.3,32.1 74.5,32.1 69.7,32.1 69.7,21.4 70.5,21.4 70.5,30.3 74.5,30.3 75.4,30.3
  region: 87.2,30.4 87.7,30.6 87.7,37.8 89.7,37.8 89.7,39.1 86,39.1 86,32.2 83.5,32.2 83.5,30.4
  region: 116.1,39.9 116.8,39.9 117.5,39.9 117.5,43.2 120.5,43.2 120.5,46.288 120.6,46.3 120.6,48.1 120.5,48.1 118.8,48.1 118.9,44.4 116.1,44.4 116.1,43.7 116.1,42.9
  region: 120.6,46.3 122.7,46.3 122.7,55.9 122.3,56.2 121,56.2 119.6,56.2 116.9,56.2 116.9,55 121,55 121,51.3 121,48.1 120.6,48.1
  region: 118,56 118,61 117.8,61 111.5,61 111.5,57.6 109.7,57.6 109.7,62.8 111.2,62.8 119.4,62.8 119.4,55.9 118,55.9
  region: 107.9,41.7 107.9,40 102.7,40 102.5,40 102.4,39.9 102.4,45 105.2,45 106.1,44.1 106.1,41.7
  region: 106.5,50 112.2,50 112.2,51.5 106.5,51.5
  region: 108.9,51.5 108.9,60 106.8,60 106.8,59.8 106.8,55.5 106.8,51.5
  region: 121.1,34.1 121.1,36.2 124.9,36.2 125,36.3 125,37.2 129.3,37.2 129.5,37 129.4,9.287 124.78,9.287 124.2,9.287 124.2,17.1 128,17.1 128,25.9 128,34.1
  region: 113.2,7.4 115,7.4 115,4.711 124.2,4.711 124.2,10.7 124.2,11.3 124.31,11.3 124.31,11.265 125.021,11.265 125.8,11.3 125.8,2.9 113.2,2.9
  region: 113.5,2.9 106.9,2.9 106.9,3 106.9,6.9 105.9,7.8 105.9,8.6 105.9,20.9 107.1,20.9 107.1,8.8 107.9,8.2 108.9,8.2 108.9,4.8 113.5,4.8
  region: 107.9,32 107.8,32.1 107,32.1 102.2,32.1 102.2,21.4 103,21.4 103,30.3 107,30.3 107.9,30.3
  region: 119.7,30.4 120.2,30.6 120.2,37.8 122.2,37.8 122.2,39.1 118.5,39.1 118.5,32.2 116,32.2 116,30.4
  region: 148.6,39.9 149.3,39.9 150,39.9 150,43.2 153,43.2 153,46.288 153.1,46.3 153.1,48.1 153,48.1 151.3,48.1 151.4,44.4 148.6,44.4 148.6,43.7 148.6,42.9
  region: 153.1,46.3 155.2,46.3 155.2,55.9 154.8,56.2 153.5,56.2 152.1,56.2 149.4,56.2 149.4,55 153.5,55 153.5,51.3 153.5,48.1 153.1,48.1
  region: 150.5,56 150.5,61 150.3,61 144,61 144,57.6 142.2,57.6 142.2,62.8 143.7,62.8 151.9,62.8 151.9,55.9 150.5,55.9
  region: 140.4,41.7 140.4,40 135.2,40 135,40 134.9,39.9 134.9,45 137.7,45 138.6,44.1 138.6,41.7
  region: 139,50 144.7,50 144.7,51.5 139,51.5
  region: 141.4,51.5 141.4,60 139.3,60 139.3,59.8 139.3,55.5 139.3,51.5
  region: 153.6,34.1 153.6,36.2 157.4,36.2 157.5,36.3 157.5,37.2 161.8,37.2 162,37 161.9,9.287 157.28,9.287 156.7,9.287 156.7,17.1 160.5,17.1 160.5,25.9 160.5,34.1
  region: 145.7,7.4 147.5,7.4 147.5,4.711 156.7,4.711 156.7,10.7 156.7,11.3 156.81,11.3 156.81,11.265 157.521,11.265 158.3,11.3 158.3,2.9 145.7,2.9
  region: 146,2.9 139.4,2.9 139.4,3 139.4,6.9 138.4,7.8 138.4,8.6 138.4,20.9 139.6,20.9 139.6,8.8 140.4,8.2 141.4,8.2 141.4,4.8 146,4.8
  region: 140.4,32 140.3,32.1 139.5,32.1 134.7,32.1 134.7,21.4 135.5,21.4 135.5,30.3 139.5,30.3 140.4,30.3
  region: 152.2,30.4 152.7,30.6 152.7,37.8 154.7,37.8 154.7,39.1 151,39.1 151,32.2 148.5,32.2 148.5,30.4
Bottom Layer:
  region net -5V: 167.95,29.4 167.8,29.4 167.75,29.6 167.75,32.9 183.75,32.9 183.75,33.7 184.95,33.7 184.95,32.9 184.95,31.4 169.05,31.4 169.05,29.4
  region net 12V: 171.6,11.3 171.6,15.6 173.1,15.6 173.1,11.3
  region net HS_GATE: 171.4,8.2 171.4,9.9 171.5,10 172.8,10 172.8,8.3 172.7,8.2
  region net HS_GATE: 170.8,28.8 170.7,28.7 169.6,28.7 169.6,30.2 170.8,30.2
  region net HS_GATE: 171.2,29.6 169.9,29.6 169.9,30.7 170,30.8 171.2,30.8
  region net HS_GND: 190.2,25.6 190.2,23.8 183,23.8 182.8,23.8 182.8,28.6 178.6,28.6 178.6,27.4 177.4,27.4 177.4,29.4 176.8,29.4 176.1,29.4 176.1,30.2 184.2,30.2 184.2,25.6
  region net 12V: 171.8,11.95 171.8,14.65 173.1,14.65 173.1,11.95
  region net HS_GND: 189.7,18.1 189.7,19.5 191.5,19.5 193.2,19.5 193.2,23.8 190.2,23.8 190.2,25.6 193.9,25.6 194.4,25.1 194.4,18.8 194.4,18.1 193.1,18.1 191.5,18.1
  region net GND_P: 192,26.3 192,28.2 188.7,28.2 188.7,41.6 187.5,41.6 187,41.6 187,26.3 190,26.3
  region net GND_P: 186.6,60.5 186.6,57.9 187,57.9 187,43 192.1,43 192.1,41.6 192.1,41 185.5,41 185.5,58 184.8,58 184.8,60.5
  region net Net18_2: 191,15.5 191,17.5 189,17.5 189,15.5
  region: 29.5,15 29.5,17 27.5,17 27.5,15
  region: 25.1,60 25.1,57.4 25.5,57.4 25.5,42.5 30.6,42.5 30.6,41.1 30.6,40.5 24,40.5 24,57.5 23.3,57.5 23.3,60
  region: 30.5,25.8 30.5,27.7 27.2,27.7 27.2,41.1 26,41.1 25.5,41.1 25.5,25.8 28.5,25.8
  region: 28.2,17.6 28.2,19 30,19 31.7,19 31.7,23.3 28.7,23.3 28.7,25.1 32.4,25.1 32.9,24.6 32.9,18.3 32.9,17.6 31.6,17.6 30,17.6
  region: 10.3,11.45 10.3,14.15 11.6,14.15 11.6,11.45
  region: 28.7,25.1 28.7,23.3 21.5,23.3 21.3,23.3 21.3,28.1 17.1,28.1 17.1,26.9 15.9,26.9 15.9,28.9 15.3,28.9 14.6,28.9 14.6,29.7 22.7,29.7 22.7,25.1
  region: 9.7,29.1 8.4,29.1 8.4,30.2 8.5,30.3 9.7,30.3
  region: 9.3,28.3 9.2,28.2 8.1,28.2 8.1,29.7 9.3,29.7
  region: 9.9,7.7 9.9,9.4 10,9.5 11.3,9.5 11.3,7.8 11.2,7.7
  region: 10.1,10.8 10.1,15.1 11.6,15.1 11.6,10.8
  region: 6.45,28.9 6.3,28.9 6.25,29.1 6.25,32.4 22.25,32.4 22.25,33.2 23.45,33.2 23.45,32.4 23.45,30.9 7.55,30.9 7.55,28.9
  region: 61,15 61,17 59,17 59,15
  region: 56.6,60 56.6,57.4 57,57.4 57,42.5 62.1,42.5 62.1,41.1 62.1,40.5 55.5,40.5 55.5,57.5 54.8,57.5 54.8,60
  region: 62,25.8 62,27.7 58.7,27.7 58.7,41.1 57.5,41.1 57,41.1 57,25.8 60,25.8
  region: 59.7,17.6 59.7,19 61.5,19 63.2,19 63.2,23.3 60.2,23.3 60.2,25.1 63.9,25.1 64.4,24.6 64.4,18.3 64.4,17.6 63.1,17.6 61.5,17.6
  region: 41.8,11.45 41.8,14.15 43.1,14.15 43.1,11.45
  region: 60.2,25.1 60.2,23.3 53,23.3 52.8,23.3 52.8,28.1 48.6,28.1 48.6,26.9 47.4,26.9 47.4,28.9 46.8,28.9 46.1,28.9 46.1,29.7 54.2,29.7 54.2,25.1
  region: 41.2,29.1 39.9,29.1 39.9,30.2 40,30.3 41.2,30.3
  region: 40.8,28.3 40.7,28.2 39.6,28.2 39.6,29.7 40.8,29.7
  region: 41.4,7.7 41.4,9.4 41.5,9.5 42.8,9.5 42.8,7.8 42.7,7.7
  region: 41.6,10.8 41.6,15.1 43.1,15.1 43.1,10.8
  region: 37.95,28.9 37.8,28.9 37.75,29.1 37.75,32.4 53.75,32.4 53.75,33.2 54.95,33.2 54.95,32.4 54.95,30.9 39.05,30.9 39.05,28.9
  region: 93.5,15 93.5,17 91.5,17 91.5,15
  region: 89.1,60 89.1,57.4 89.5,57.4 89.5,42.5 94.6,42.5 94.6,41.1 94.6,40.5 88,40.5 88,57.5 87.3,57.5 87.3,60
  region: 94.5,25.8 94.5,27.7 91.2,27.7 91.2,41.1 90,41.1 89.5,41.1 89.5,25.8 92.5,25.8
  region: 92.2,17.6 92.2,19 94,19 95.7,19 95.7,23.3 92.7,23.3 92.7,25.1 96.4,25.1 96.9,24.6 96.9,18.3 96.9,17.6 95.6,17.6 94,17.6
  region: 74.3,11.45 74.3,14.15 75.6,14.15 75.6,11.45
  region: 92.7,25.1 92.7,23.3 85.5,23.3 85.3,23.3 85.3,28.1 81.1,28.1 81.1,26.9 79.9,26.9 79.9,28.9 79.3,28.9 78.6,28.9 78.6,29.7 86.7,29.7 86.7,25.1
  region: 73.7,29.1 72.4,29.1 72.4,30.2 72.5,30.3 73.7,30.3
  region: 73.3,28.3 73.2,28.2 72.1,28.2 72.1,29.7 73.3,29.7
  region: 73.9,7.7 73.9,9.4 74,9.5 75.3,9.5 75.3,7.8 75.2,7.7
  region: 74.1,10.8 74.1,15.1 75.6,15.1 75.6,10.8
  region: 70.45,28.9 70.3,28.9 70.25,29.1 70.25,32.4 86.25,32.4 86.25,33.2 87.45,33.2 87.45,32.4 87.45,30.9 71.55,30.9 71.55,28.9
  region: 126,15 126,17 124,17 124,15
  region: 121.6,60 121.6,57.4 122,57.4 122,42.5 127.1,42.5 127.1,41.1 127.1,40.5 120.5,40.5 120.5,57.5 119.8,57.5 119.8,60
  region: 127,25.8 127,27.7 123.7,27.7 123.7,41.1 122.5,41.1 122,41.1 122,25.8 125,25.8
  region: 124.7,17.6 124.7,19 126.5,19 128.2,19 128.2,23.3 125.2,23.3 125.2,25.1 128.9,25.1 129.4,24.6 129.4,18.3 129.4,17.6 128.1,17.6 126.5,17.6
  region: 106.8,11.45 106.8,14.15 108.1,14.15 108.1,11.45
  region: 125.2,25.1 125.2,23.3 118,23.3 117.8,23.3 117.8,28.1 113.6,28.1 113.6,26.9 112.4,26.9 112.4,28.9 111.8,28.9 111.1,28.9 111.1,29.7 119.2,29.7 119.2,25.1
  region: 106.2,29.1 104.9,29.1 104.9,30.2 105,30.3 106.2,30.3
  region: 105.8,28.3 105.7,28.2 104.6,28.2 104.6,29.7 105.8,29.7
  region: 106.4,7.7 106.4,9.4 106.5,9.5 107.8,9.5 107.8,7.8 107.7,7.7
  region: 106.6,10.8 106.6,15.1 108.1,15.1 108.1,10.8
  region: 102.95,28.9 102.8,28.9 102.75,29.1 102.75,32.4 118.75,32.4 118.75,33.2 119.95,33.2 119.95,32.4 119.95,30.9 104.05,30.9 104.05,28.9
  region: 158.5,15 158.5,17 156.5,17 156.5,15
  region: 154.1,60 154.1,57.4 154.5,57.4 154.5,42.5 159.6,42.5 159.6,41.1 159.6,40.5 153,40.5 153,57.5 152.3,57.5 152.3,60
  region: 159.5,25.8 159.5,27.7 156.2,27.7 156.2,41.1 155,41.1 154.5,41.1 154.5,25.8 157.5,25.8
  region: 157.2,17.6 157.2,19 159,19 160.7,19 160.7,23.3 157.7,23.3 157.7,25.1 161.4,25.1 161.9,24.6 161.9,18.3 161.9,17.6 160.6,17.6 159,17.6
  region: 139.3,11.45 139.3,14.15 140.6,14.15 140.6,11.45
  region: 157.7,25.1 157.7,23.3 150.5,23.3 150.3,23.3 150.3,28.1 146.1,28.1 146.1,26.9 144.9,26.9 144.9,28.9 144.3,28.9 143.6,28.9 143.6,29.7 151.7,29.7 151.7,25.1
  region: 138.7,29.1 137.4,29.1 137.4,30.2 137.5,30.3 138.7,30.3
  region: 138.3,28.3 138.2,28.2 137.1,28.2 137.1,29.7 138.3,29.7
  region: 138.9,7.7 138.9,9.4 139,9.5 140.3,9.5 140.3,7.8 140.2,7.7
  region: 139.1,10.8 139.1,15.1 140.6,15.1 140.6,10.8
  region: 135.45,28.9 135.3,28.9 135.25,29.1 135.25,32.4 151.25,32.4 151.25,33.2 152.45,33.2 152.45,32.4 152.45,30.9 136.55,30.9 136.55,28.9

## Silkscreen, mask and mechanical layers (free items; w line width, h text height)
Top Overlay:
  lines w0.2: 35,0 35,65 ; 67.5,0 67.5,65 ; 100,0 100,65 ; 132.5,0 132.5,64 ; 165,0 165,65
  text "5V_D" at 173.4,61.2 h0.7 r90
  text "IN+" at 181.1,61.1 h0.7 r90
  text "5V_P" at 188.9,61.1 h0.7 r90
  text "GND_D" at 175.9,61 h0.7 r90
  text "IN-" at 178.5,61 h0.7 r90
  text "GND_P" at 186.2,60.9 h0.7 r90
  text "5V_D" at 11.9,60.7 h0.7 r90
  text "5V_D" at 43.4,60.7 h0.7 r90
  text "5V_D" at 75.9,60.7 h0.7 r90
  text "5V_D" at 108.4,60.7 h0.7 r90
  text "5V_D" at 140.9,60.7 h0.7 r90
  text "IN+" at 19.6,60.6 h0.7 r90
  text "5V_P" at 27.4,60.6 h0.7 r90
  text "IN+" at 51.1,60.6 h0.7 r90
  text "5V_P" at 58.9,60.6 h0.7 r90
  text "IN+" at 83.6,60.6 h0.7 r90
  text "5V_P" at 91.4,60.6 h0.7 r90
  text "IN+" at 116.1,60.6 h0.7 r90
  text "5V_P" at 123.9,60.6 h0.7 r90
  text "IN+" at 148.6,60.6 h0.7 r90
  text "5V_P" at 156.4,60.6 h0.7 r90
  text "GND_D" at 14.4,60.5 h0.7 r90
  text "IN-" at 17,60.5 h0.7 r90
  text "GND_D" at 45.9,60.5 h0.7 r90
  text "IN-" at 48.5,60.5 h0.7 r90
  text "GND_D" at 78.4,60.5 h0.7 r90
  text "IN-" at 81,60.5 h0.7 r90
  text "GND_D" at 110.9,60.5 h0.7 r90
  text "IN-" at 113.5,60.5 h0.7 r90
  text "GND_D" at 143.4,60.5 h0.7 r90
  text "IN-" at 146,60.5 h0.7 r90
  text "GND_P" at 24.7,60.4 h0.7 r90
  text "GND_P" at 56.2,60.4 h0.7 r90
  text "GND_P" at 88.7,60.4 h0.7 r90
  text "GND_P" at 121.2,60.4 h0.7 r90
  text "GND_P" at 153.7,60.4 h0.7 r90
  text "IN-" at 178.8,52.3 h0.7 r90
  text "D_D" at 176.2,52.2 h0.7 r90
  text "IN-" at 17.3,51.8 h0.7 r90
  text "IN-" at 48.8,51.8 h0.7 r90
  text "IN-" at 81.3,51.8 h0.7 r90
  text "IN-" at 113.8,51.8 h0.7 r90
  text "IN-" at 146.3,51.8 h0.7 r90
  text "D_D" at 14.7,51.7 h0.7 r90
  text "D_D" at 46.2,51.7 h0.7 r90
  text "D_D" at 78.7,51.7 h0.7 r90
  text "D_D" at 111.2,51.7 h0.7 r90
  text "D_D" at 143.7,51.7 h0.7 r90
  text "HS_VDC" at 182,1.9 h0.6 r90
  text "HS_GATE" at 176.8,1.8 h0.55 r90
  text "HS_GND" at 179.3,1.8 h0.6 r90
  text "HS_VDC" at 20.5,1.4 h0.6 r90
  text "HS_VDC" at 52,1.4 h0.6 r90
  text "HS_VDC" at 84.5,1.4 h0.6 r90
  text "HS_VDC" at 117,1.4 h0.6 r90
  text "HS_VDC" at 149.5,1.4 h0.6 r90
  text "HS_GATE" at 15.3,1.3 h0.55 r90
  text "HS_GND" at 17.8,1.3 h0.6 r90
  text "HS_GATE" at 46.8,1.3 h0.55 r90
  text "HS_GND" at 49.3,1.3 h0.6 r90
  text "HS_GATE" at 79.3,1.3 h0.55 r90
  text "HS_GND" at 81.8,1.3 h0.6 r90
  text "HS_GATE" at 111.8,1.3 h0.55 r90
  text "HS_GND" at 114.3,1.3 h0.6 r90
  text "HS_GATE" at 144.3,1.3 h0.55 r90
  text "HS_GND" at 146.8,1.3 h0.6 r90